# Altium PCB CIU32F003-CXD V1.0.0.PcbDoc
Units mm, origin at the board's own origin, x right, y up, seen from the top; angles counter-clockwise.
Board outline 12.2 x 9.2 mm, 4 copper layers (Top Layer, Layer 1, Layer 2, Bottom Layer), stack 0.778 mm thick; 22 components, 19 nets, 97 pads, 38 vias.
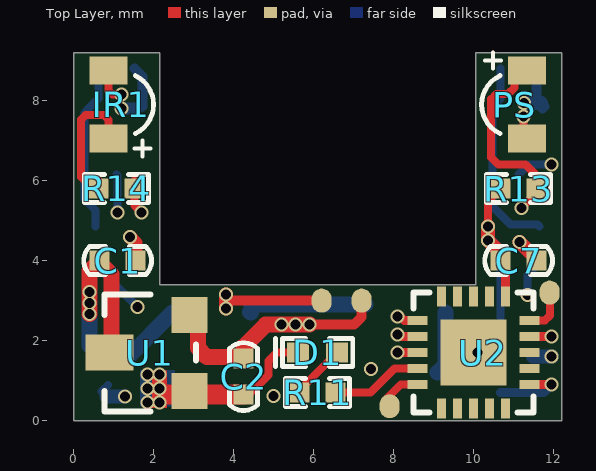
[diagram p0: Top Layer view]
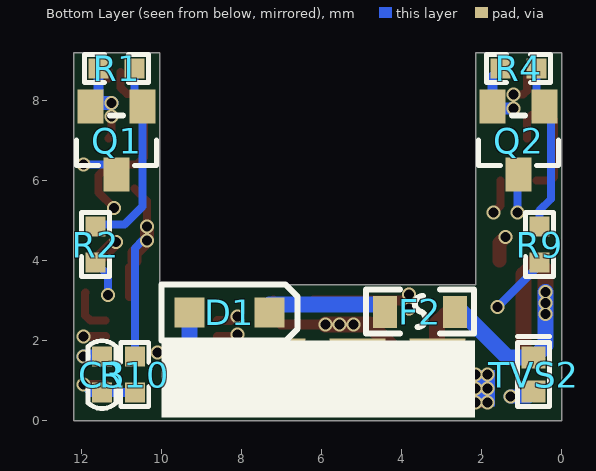
[diagram p1: Bottom Layer view, seen from below]
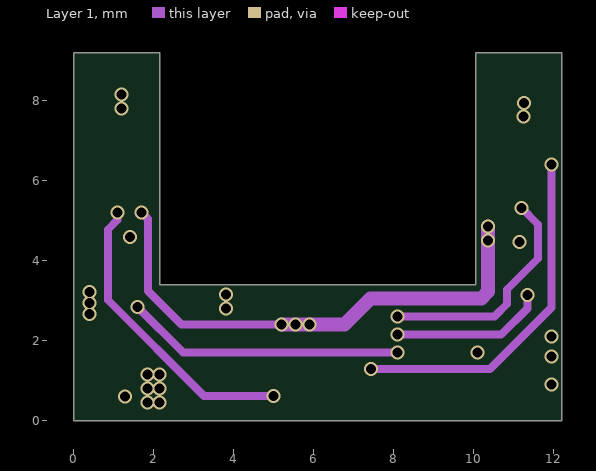
[diagram p2: Layer 1]
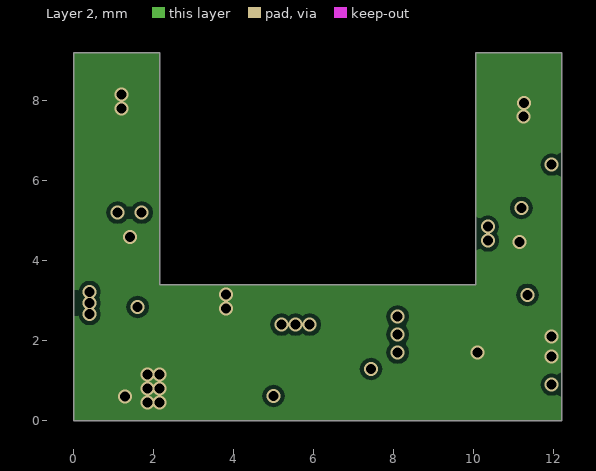
[diagram p3: Layer 2]

## Layer stack, top to bottom
Top Solder: solder mask 0.0102, Solder Resist, Dk 3.5
Top Layer: signal copper 0.0356
Dielectric 1: core 0.254, FR-4, Dk 4.2
Layer 1: signal copper 0.036
Dielectric 3: prepreg 0.127, Dk 4.2
Layer 2: signal copper 0.036
Dielectric 2: core 0.254, Dk 4.2
Bottom Layer: signal copper 0.0356
Bottom Solder: solder mask 0.0102, Solder Resist, Dk 3.5

## Board outline
0,0 0,9.2 2.15,9.2 2.15,3.4 10.05,3.4 10.05,9.2 12.2,9.2 12.2,0

## Design rules (kind name [scope] priority, off if disabled: settings)
Clearance [All] p1: gap=0.1 ignorepadtopadclearanceinfootprint=TRUE
PolygonConnect PolygonConnect_1 [All vs IsVia] p1: connectstyle=Direct reliefconductorwidth=0.254 reliefentries=4 polygonreliefangle="90 Angle" airgapwidth=0.254
PolygonConnect [All] p2: connectstyle=Relief reliefconductorwidth=0.254 reliefentries=4 polygonreliefangle="90 Angle" airgapwidth=0.254
RoutingVias [All] p1: holewidth=0.15 width=0.25 viastyle="Through Hole" minholewidth=0.15 minwidth=0.25 maxholewidth=0.4 maxwidth=0.6
SolderMaskExpansion [All] p1: expansion=0.102
Width Width_1 [All] p1: maxlimit=0.5 minlimit=0.12 preferedwidth=0.2
30 further rules are at their usual default settings.

## Components (designator, comment, footprint, x,y, rotation, side; value= is the part's Value field where it differs from the comment)
C1 "105_C" 0402C 1.1,4 r180 top
C2 "106_C" 0402C 4.25,1.1 r90 top
C3 "104_C" 0402C 11.49,1.15 r270 bottom
C7 "106_C" 0402C 11.125,4 r180 top
D1 "Comment" SOD-323 8.3,2.7 r0 bottom
D1 "Comment" 0402LED 6.1,1.7 r0 top
F2 "Comment" 0603F 3.535,2.731 r180 bottom
IR1 "Comment" 0802LED 1.5,7.9 r270 top locked
PS "Comment" 0802LED 10.7,7.9 r90 top locked
Q1 "NPN" "SOT-323-3 - duplicate" 11.125,7 r0 bottom
Q2 "NPN" "SOT-323-3 - duplicate" 1.075,7 r0 bottom
R1 "472_R" 0402R 11.125,8.8 r180 bottom
R2 "102_R" 0402R 11.65,4.4 r270 bottom
R4 "472_R" 0402R 1.075,8.8 r180 bottom
R9 "102_R" 0402R 0.55,4.4 r270 bottom
R10 "502_R" 0402R 10.67,1.15 r90 bottom
R11 "102_R" 0402R 6.1,0.7 r0 top
R13 "103_R" 0402R 11.125,5.8 r180 top
R14 "102_R" 0402R 1.075,5.8 r0 top
TVS2 "DFN1006-2L" DFN1006-2L 0.7,1.15 r270 bottom
U1 "HT7150-1" SOT-23-3 1.9,1.7 r90 top
U2 "CIU32F003" QFN-20(3×3) 10,1.7 r180 top locked

## Footprints (in the part's own frame and the unit in brackets; to place one, negate y for a bottom-side part, rotate by r counter-clockwise, add the part's x,y. Pads: shape width x height; smd on the part's side, far side on the other; paste and mask are expansions set on the pad)
0402C [mm]
  rect 0.5x0.5 smd: 1(0.45,0) 2(-0.45,0)
  round 0.2 on Mech15: ""(0,0)
  silkscreen extent -0.85,-0.35 0.85,0.35
0402LED [mm]
  rect 0.55x0.5 smd: 1(0.49,0) 2(-0.49,0)
  round 0.2 on Mech15: ""(0,0)
  silkscreen extent -1.05,-0.35 0.88,0.35
0402R [mm]
  rect 0.5x0.5 smd: 1(0.45,0) 2(-0.45,0)
  round 0.2 on Mech15: ""(0,0)
  silkscreen extent -0.8,-0.35 0.8,0.35
0603F [mm]
  rect 0.6x0.8 smd: 1(-0.875,-0.011) 2(0.875,-0.011)
  round 0.2 on Mech15: ""(0,0)
  silkscreen extent -1.35,-0.55 1.35,0.55
0802LED [mm]
  rect 0.7x0.95 smd: 1(-0.85,-0.63) 2(0.85,-0.63)
  round 0.2 on Mech15: ""(0,0)
  silkscreen extent -0.73,0.02 1.3,0.5
DFN1006-2L [mm]
  rect 0.55x0.6 smd: 1(-0.425,0) 2(0.425,0)
  round 0.2 on Mech15: ""(0,0)
  silkscreen extent -0.95,-0.4 0.8,0.4
QFN-20(3×3) [mm]
  rect 0.5x0.22 smd: 1(-1.4,0.8) 2(-1.4,0.4) 3(-1.4,0) 4(-1.4,-0.4) 5(-1.4,-0.8) 11(1.4,-0.8) 12(1.4,-0.4) 13(1.4,0) 14(1.4,0.4) 15(1.4,0.8)
  rect 0.22x0.5 smd: 6(-0.8,-1.4) 7(-0.4,-1.4) 8(0,-1.4) 9(0.4,-1.4) 10(0.8,-1.4) 16(0.8,1.4) 17(0.4,1.4) 18(0,1.4) 19(-0.4,1.4) 20(-0.8,1.4)
  rect 1.65x1.65 smd: 21(0,0)
  round 0.4 on Top Overlay: ""(-1.85,1.32)
  round 0.2 on Mech15: ""(0,0)
  silkscreen extent -1.5,-1.5 1.5,1.5
SOD-323 [mm]
  rect 0.75x0.75 smd: 1(-1,0) 2(1,0)
  round 0.2 on Mech15: ""(0,0)
  silkscreen extent -1.7,-0.7 1.7,0.7
SOT-23-3 [mm]
  rect 0.9x0.9 smd: 1(-0.965,-1) 3(0.94,-1)
  rect 0.9x1.2 smd: 2(0,1)
  round 0.2 on Mech15: ""(0,0)
  silkscreen extent -1.47,-1.16 1.45,1.13
"SOT-323-3 - duplicate" [mm]
  rect 0.65x0.85 smd: 1(-0.65,-0.85) 2(0.65,-0.85) 3(0,0.85)
  round 0.2 on Mech15: ""(0,0)
  silkscreen extent -1,-0.63 1,0.63

## Free pads (board coordinates)
  rect 1.4x1.7 smd far side: ""(3.1,1.2) ""(5.1,1.2) ""(7.1,1.2) ""(9.1,1.2)
  oval 0.5x0.6 smd: ""(6.2,3) ""(7.2,3) ""(7.9,0.36) ""(11.9,3.2)

## Via types
v1: diameter 0.35, hole 0.25, Top Layer to Bottom Layer, tented both sides, 38 vias

## Nets (pads, with @x,y where several pads share a name; then routed paths per layer and width w, separated by ;. In a path a pad name is that pad's centre, name@x,y a point inside that pad or via, vN(x,y) a via of type N, cw(c..) or ccw(c..) an arc to the next point about the centre after c; other vN are vias at no path point)
D1_1: D1.1@7.3,2.7 F2.1 | length 2.9
  Bottom Layer w0.4: F2.1 F2.1@4.43,2.7 ; F2.1@4.43,2.9 D1.1@7.3,2.9
GND: C1.2 C2.2 C3.2 C7.2 D1.2@5.61,1.7 IR1.1 pad.@3.1,1.2 pad.@6.2,3 PS.1 Q1.2 Q2.2 R1.2 R4.2 TVS2.2 U1.1 U2.4 U2.21 | length 14.4
  Top Layer w0.2: IR1.1 0.87,8.247 0.967,8.15 v1(1.2,8.15) ; C2.2 4.278,0.622 4.355,0.622 4.874,1.141 4.874,1.494 5.08,1.7 D1.2@5.61,1.7 ; v1(11.25,7.6) 11.25,7.13 PS.1
  Top Layer w0.22: U2.4 v1(11.95,2.1)
  Top Layer w0.25: 3.9,3 pad.@6.2,3
  Top Layer w0.35: v1(1.404,4.591) 1.55,4.445 C1.2 ; v1(3.81,2.8) v1(3.81,3.15) ; v1(11.146,4.463) 11.15,4.463 11.575,4.038 C7.2
  Top Layer w0.5: 2.25,0.65 C2.2
  Bottom Layer w0.15: Q2.2@1.585,7.71 Q2.2
  Bottom Layer w0.2: TVS2.2@0.825,0.6 TVS2.2 TVS2.2@0.865,0.89 ; Q1.2@11.679,7.946 Q1.2
  Bottom Layer w0.25: R4.2 1.725,8.6 Q2.2 ; R1.2 11.575,8.05 Q1.2@11.679,7.946 ; Q1.2@11.725,7.8 Q1.2
  Bottom Layer w0.3: v1(1.2,7.8) Q2.2@1.585,7.8
  Bottom Layer w0.35: TVS2.2@0.825,0.6 v1(1.28,0.6) ; v1(11.254,7.946) Q1.2@11.679,7.946 ; C3.2 v1(11.95,1.6)
  other v1: 1.85,0.45 2.15,0.45 1.85,0.8 2.15,0.8 1.85,1.15 2.15,1.15 10.1,1.7
IO_ADC_IN0: PS.2 R13.2 U2.11 | length 11.3
  Top Layer w0.2: v1(8.1,2.6) 8.171,2.6 8.271,2.5 ; PS.2@11.027,8.715 11.027,8.332 10.862,8.167 10.569,8.167 10.438,8.036 10.438,6.58 10.616,6.402 11.299,6.402 11.575,6.126 R13.2 11.575,5.702 v1(11.193,5.32) ; PS.2@11.33,8.554 PS.2
  Top Layer w0.22: 8.271,2.5 U2.11
  Layer 1 w0.2: v1(8.1,2.6) 10.52,2.6 10.84,2.92 10.84,3.284 11.604,4.048 11.604,4.909 v1(11.193,5.32)
IO_LED_RED: R11.1 U2.14 | length 2.3
  Top Layer w0.2: R11.1 7.421,0.7 8.021,1.3 U2.14
IO_OUTPUT_NC: R9.1 U2.13 | length 9
  Top Layer w0.22: v1(8.1,1.7) U2.13
  Layer 1 w0.2: v1(1.6,2.84) 2.74,1.7 v1(8.1,1.7)
  Bottom Layer w0.2: R9.1 0.55,3.89 v1(1.6,2.84)
IO_OUTPUT_NO: R2.1 U2.12 | length 5.3
  Top Layer w0.2: v1(8.1,2.15) 8.1,2.137 v1@8.137,2.1
  Top Layer w0.22: v1@8.137,2.1 U2.12
  Layer 1 w0.2: v1(8.1,2.15) 10.69,2.15 11.344,2.804 v1(11.344,3.146)
  Bottom Layer w0.2: v1(11.344,3.146) 11.344,3.644 R2.1
IO_SWCLK: pad.@7.9,0.36 U2.15 | length 1.1
  Top Layer w0.2: pad.@7.8,0.36 7.8,0.52 8.18,0.9 U2.15
IO_SWDIO: pad.@11.9,3.2 U2.5 | length 1.1
  Top Layer w0.2: U2.5 11.78,2.5 11.91,2.63 11.91,3.19 pad.@11.9,3.2
NC: pad.@5.1,1.2 Q2.3 | length 8.4
  Layer 1 w0.2: v1(1.1,5.2) 1.1,5.02 0.864,4.784 0.864,3.012 3.261,0.615 v1(4.998,0.615)
  Bottom Layer w0.2: Q2.3 1.1,6.125 v1(1.1,5.2)
NO: pad.@7.1,1.2 Q1.3 | length 9.7
  Layer 1 w0.2: v1(7.435,1.29) 10.41,1.29 11.95,2.83 v1(11.95,6.4)
  Bottom Layer w0.2: Q1.3 11.375,6.4 v1(11.95,6.4)
NRST: C3.1 R10.2 U2.1 | length 1.9
  Top Layer w0.22: U2.1 v1(11.95,0.9)
  Bottom Layer w0.22: R10.2 11.49,0.7 11.75,0.7 v1(11.95,0.9)
Q1_B: Q1.1 R1.1 R2.2 | length 4.9
  Bottom Layer w0.2: R1.1 10.675,8.05 Q1.1 10.475,5.351 10.925,4.901 11.599,4.901 R2.2
Q2_B: Q2.1 R4.1 R9.2 | length 4.2
  Bottom Layer w0.2: R9.2 0.55,5.259 0.272,5.537 0.272,7.697 Q2.1 0.625,8.05 R4.1
R11_2: D1.1@6.59,1.7 R11.2 | length 1.4
  Top Layer w0.2: R11.2 5.65,0.76 6.59,1.7 D1.1@6.55,1.7
R13_2: IR1.2 R14.2 | length 3.2
  Top Layer w0.2: R14.2@0.625,6 0.28,6 0.19,6.09 0.19,7.531 0.294,7.635 0.755,7.635 0.87,7.52 IR1.2
V+: D1.2@9.3,2.7 pad.@9.1,1.2 | length 1.6
  Bottom Layer w0.4: pad.@9.1,1.2 9.3,1.4 D1.2@9.3,2.7
VCC: C2.1 C7.1 pad.@7.2,3 R10.1 R13.1 R14.1 U1.3 U2.6 | length 25.7
  Top Layer w0.2: R14.1@1.525,6 R14.1 1.525,5.375 v1(1.7,5.2) ; v1(10.36,4.85) 10.36,5.485 R13.1
  Top Layer w0.22: U2.6 C7.1@10.8,3.825
  Top Layer w0.25: v1(5.9,2.4) 7.014,2.4 7.2,2.586 pad.@7.2,3
  Top Layer w0.35: v1@10.364,4.872 v1(10.364,4.5) 10.675,4.189 C7.1
  Top Layer w0.4: U1.3 3.11,2.43 3.11,1.81 3.33,1.59 4.21,1.59 C2.1 4.25,1.85 4.8,2.4 v1(5.2,2.4) v1(5.55,2.4) v1(5.9,2.4)
  Layer 1 w0.2: v1(1.7,5.2) 1.859,5.041 1.859,3.241 2.7,2.4 v1(5.2,2.4)
  Layer 1 w0.35: v1(5.2,2.4) v1(5.55,2.4) v1(5.9,2.4) 6.767,2.4 7.426,3.059 10.194,3.059 10.36,3.225 v1(10.36,4.85)
  Bottom Layer w0.2: v1(10.364,4.5) 10.477,4.5 10.67,4.307 R10.1
VDD: 
VIN: C1.1 F2.2 TVS2.1 U1.2 | length 8.1
  Top Layer w0.4: v1(0.4,2.66) v1(0.4,2.94) v1(0.4,3.22) 0.4,3.75 C1.1 0.65,3.95 0.95,3.65 0.95,1.75 U1.2
  Bottom Layer w0.4: v1(0.4,3.22) v1(0.4,2.94) v1(0.4,2.66) 0.4,1.875 TVS2.1 1.347,1.575 2.492,2.72 F2.2
pads on no net: C1. C2. C3. C7. D1. F2. IR1. PS. Q1. Q2. R1. R2. R4. R9. R10. R11. R13. R14. TVS2. U1. U2. U2.2 U2.3 U2.7 U2.8 U2.9 U2.10 U2.16 U2.17 U2.18 U2.19 U2.20

## Polygon pours and split planes (outlines as drawn)
GND on Layer 2 "Layer 2-GND" (solid, pour order 4): 0,0 0,9.2 2.15,9.2 2.15,3.4 10.05,3.4 10.05,9.2 12.2,9.2 12.2,0

## Other copper
Top Layer:
  rectangle net GND: 1.96,0.32 2.34,1.25
Bottom Layer:
  rectangle net GND: 1.66,0.35 2.53,1.26

## Silkscreen, mask and mechanical layers (free items; w line width, h text height)
Top Overlay:
  text "CIU32F003-CXD" at 0.174,-3.277 h0.5
  text "V1.0.0" at 0.263,-4.138 h0.5
Bottom Overlay:
  rectangle: 2.16,0.08 10,2
  text "V-" at 2.92,-1.997 h0.5 r270
  text "O2" at 4.907,-1.997 h0.5 r270
  text "O1" at 6.893,-1.997 h0.5 r270
  text "V+" at 8.88,-1.997 h0.5 r270
Mechanical 1:
  the board outline again, w0.1
Mechanical 15:
  lines w0.1: 0.4,0.4 0.4,9 2.65,9 2.65,3.4 9.55,3.4 9.55,9 11.8,9 11.8,0.4 0.4,0.4